# EAGLE board improved sample-and-hold-cpy (EAGLE 7.2.0)
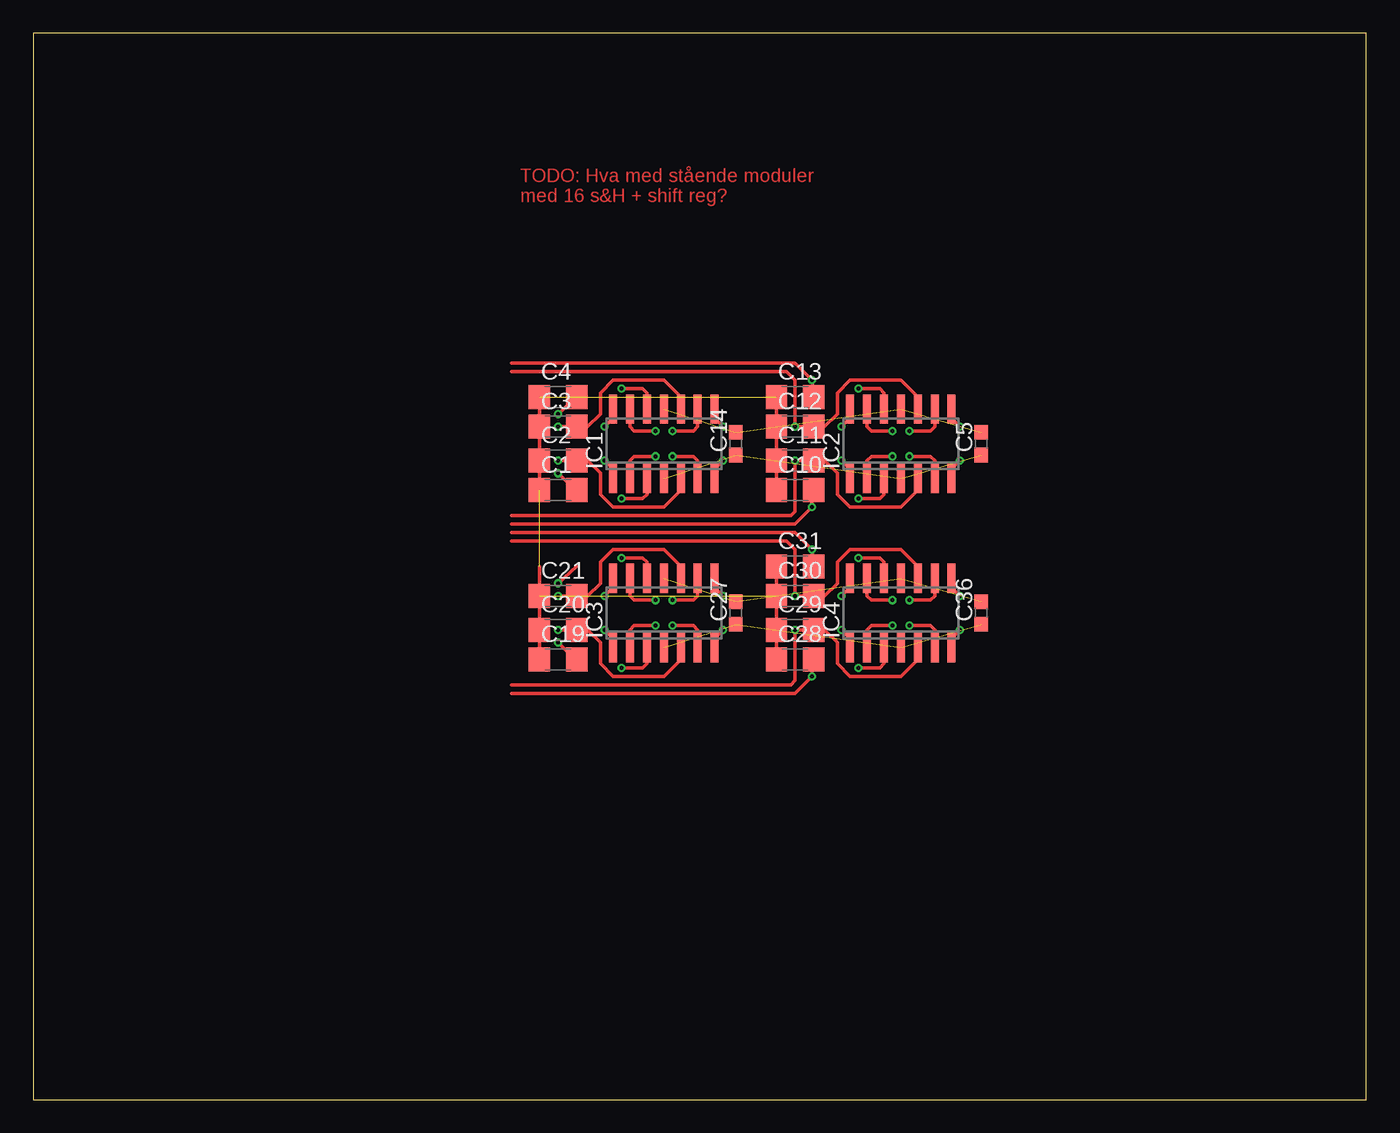
[diagram p0: board, top side]
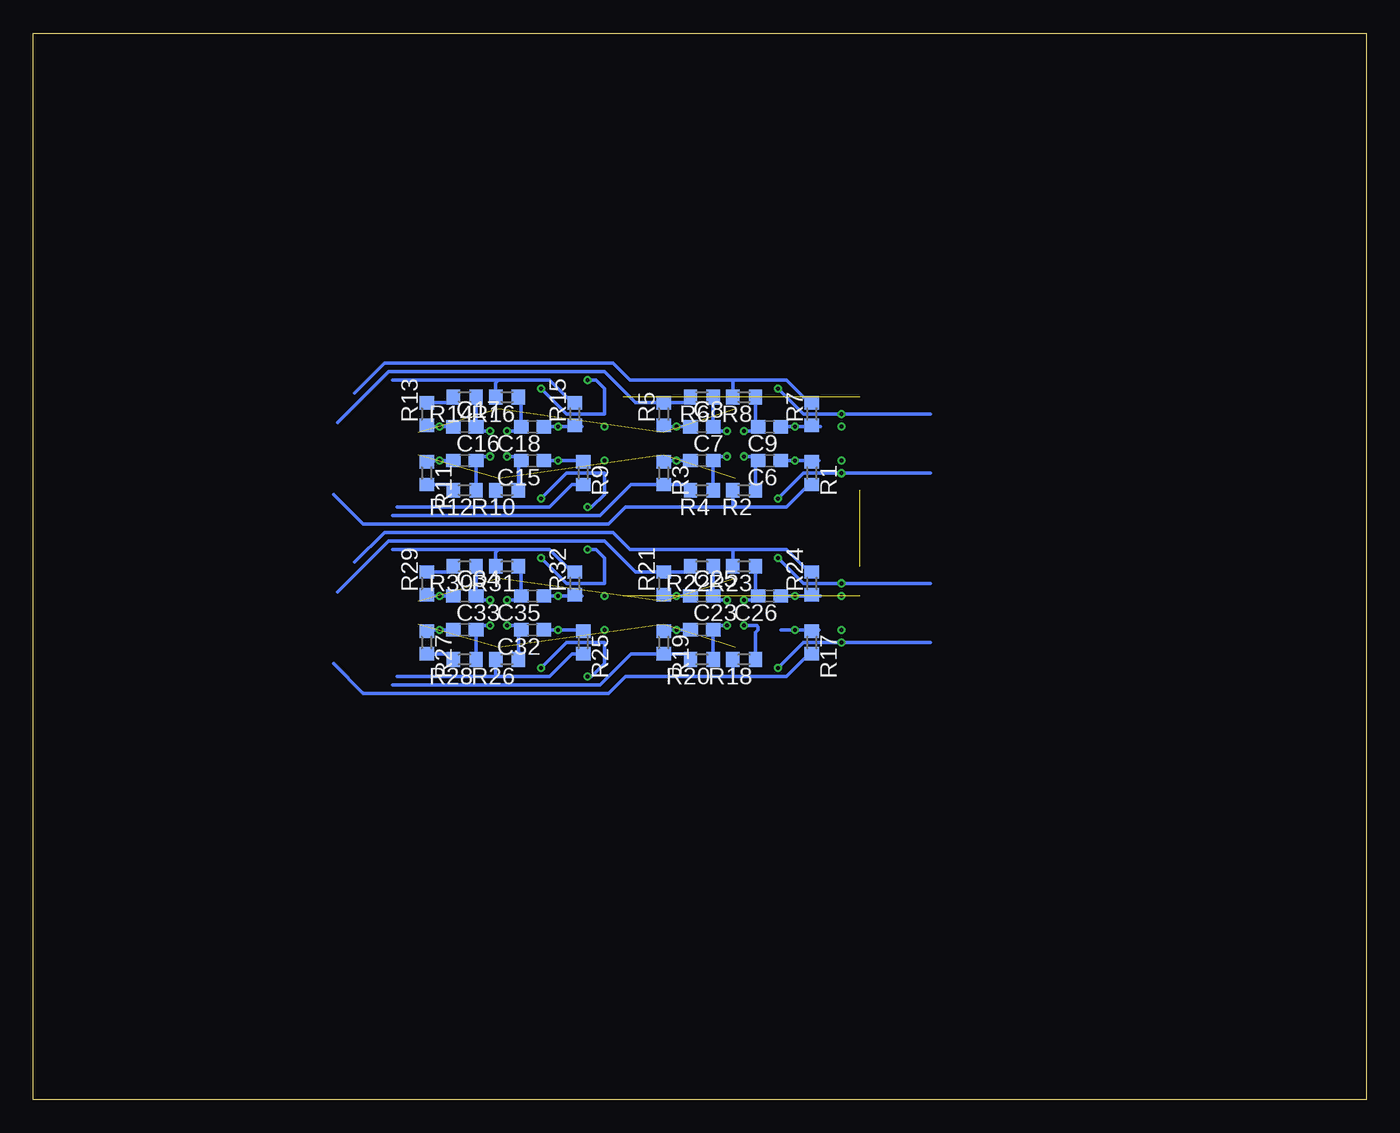
[diagram p1: board, bottom side, seen from below]

Size 100 x 80 mm. Coordinates in mm from the lower left corner, seen from the top.
Outline: 0,0 100,0 100,80 0,80 0,0
Copper layers (1*16): Top 0.035mm / dielectric 1.5mm / Bottom 0.035mm
Design rules "dirt_cheap_dirty_boards.v1": minimum track width 5mil, minimum drill 12mil, track to track 5mil, track to pad 5mil, pad to pad 5mil, via to via 5mil, smd to smd 0mil, copper to edge 10mil, drill to drill 10mil, minimum pad ring 10mil, minimum via ring 6mil, stop-mask expansion 2mil, vias tented up to drill 25mil, thermal gap 10mil

## Footprints (pad centres in the part's own frame; a part is rotated, then mirrored left to right if it is on the bottom)
C1206 = smd 1.6 x 1.8: 1 -1.4,0; 2 1.4,0
C0603 = smd 1.1 x 1: 1 -0.85,0; 2 0.85,0
SO14 = smd 0.6 x 2.2: 1 -3.81,-2.6; 2 -2.54,-2.6; 3 -1.27,-2.6; 4 0,-2.6; 5 1.27,-2.6; 6 2.54,-2.6; 7 3.81,-2.6; 8 3.81,2.6; 9 2.54,2.6; 10 1.27,2.6; 11 0,2.6; 12 -1.27,2.6; 13 -2.54,2.6; 14 -3.81,2.6
R0603 = smd 1 x 1.1: 1 -0.85,0; 2 0.85,0

## Placement (x,y rotation side)
C1  [C1206]  39.37,45.72 0 top
C2  [C1206]  39.37,47.94 0 top
C3  [C1206]  39.37,50.48 0 top
C4  [C1206]  39.37,52.7 0 top
C5  0.1uF  [C0603]  71.12,49.21 90 top
C6  0.1uF  [C0603]  44.77,47.94 180 bottom
C7  0.1uF  [C0603]  49.85,47.94 0 bottom
C8  0.1uF  [C0603]  49.85,50.48 0 bottom
C9  0.1uF  [C0603]  44.77,50.48 180 bottom
C10  [C1206]  57.15,45.72 0 top
C11  [C1206]  57.15,47.94 0 top
C12  [C1206]  57.15,50.48 0 top
C13  [C1206]  57.15,52.7 0 top
C14  0.1uF  [C0603]  52.7,49.21 90 top
C15  0.1uF  [C0603]  62.55,47.94 180 bottom
C16  0.1uF  [C0603]  67.63,47.94 0 bottom
C17  0.1uF  [C0603]  67.63,50.48 0 bottom
C18  0.1uF  [C0603]  62.55,50.48 180 bottom
C19  [C1206]  39.37,33.02 0 top
C20  [C1206]  39.37,35.24 0 top
C21  [C1206]  39.37,37.78 0 top
C23  0.1uF  [C0603]  49.85,35.24 0 bottom
C25  0.1uF  [C0603]  49.85,37.78 0 bottom
C26  0.1uF  [C0603]  44.77,37.78 180 bottom
C27  0.1uF  [C0603]  52.7,36.51 90 top
C28  [C1206]  57.15,33.02 0 top
C29  [C1206]  57.15,35.24 0 top
C30  [C1206]  57.15,37.78 0 top
C31  [C1206]  57.15,40.01 0 top
C32  0.1uF  [C0603]  62.55,35.24 180 bottom
C33  0.1uF  [C0603]  67.63,35.24 0 bottom
C34  0.1uF  [C0603]  67.63,37.78 0 bottom
C35  0.1uF  [C0603]  62.55,37.78 180 bottom
C36  0.1uF  [C0603]  71.12,36.51 90 top
IC1  TL074D  [SO14]  47.31,49.21 0 top
IC2  TL074D  [SO14]  65.09,49.21 0 top
IC3  TL074D  [SO14]  47.31,36.51 0 top
IC4  TL074D  [SO14]  65.09,36.51 0 top
R1  100R  [R0603]  41.59,46.99 270 bottom
R2  1k  [R0603]  46.67,45.72 180 bottom
R3  100R  [R0603]  52.7,46.99 270 bottom
R4  1k  [R0603]  49.85,45.72 180 bottom
R5  100R  [R0603]  52.7,51.44 90 bottom
R6  1k  [R0603]  49.85,52.7 180 bottom
R7  100R  [R0603]  41.59,51.44 90 bottom
R8  1k  [R0603]  46.67,52.7 180 bottom
R9  100R  [R0603]  58.74,46.99 270 bottom
R10  1k  [R0603]  64.45,45.72 180 bottom
R11  100R  [R0603]  70.48,46.99 270 bottom
R12  1k  [R0603]  67.63,45.72 180 bottom
R13  100R  [R0603]  70.48,51.44 90 bottom
R14  1k  [R0603]  67.63,52.7 180 bottom
R15  100R  [R0603]  59.37,51.44 90 bottom
R16  1k  [R0603]  64.45,52.7 180 bottom
R17  100R  [R0603]  41.59,34.29 270 bottom
R18  1k  [R0603]  46.67,33.02 180 bottom
R19  100R  [R0603]  52.7,34.29 270 bottom
R20  1k  [R0603]  49.85,33.02 180 bottom
R21  100R  [R0603]  52.7,38.73 90 bottom
R22  1k  [R0603]  49.85,40.01 180 bottom
R23  1k  [R0603]  46.67,40.01 180 bottom
R24  100R  [R0603]  41.59,38.73 90 bottom
R25  100R  [R0603]  58.74,34.29 270 bottom
R26  1k  [R0603]  64.45,33.02 180 bottom
R27  100R  [R0603]  70.48,34.29 270 bottom
R28  1k  [R0603]  67.63,33.02 180 bottom
R29  100R  [R0603]  70.48,38.73 90 bottom
R30  1k  [R0603]  67.63,40.01 180 bottom
R31  1k  [R0603]  64.45,40.01 180 bottom
R32  100R  [R0603]  59.37,38.73 90 bottom

## Library data of the parts
C1-C21 C23 C25-C36 R1-R32 = resistor
IC1-IC4 = linear

## Nets
+15V: C5.1 C14.1 IC1.4 IC2.4
+15V1: C27.1 C36.1 IC3.4 IC4.4
-15V: C5.2 C14.2 IC1.11 IC2.11
-15V1: C27.2 C36.2 IC3.11 IC4.11
AGND: C1.1 C2.1 C3.1 C4.1 C10.1 C11.1 C12.1 C13.1
AGND1: C19.1 C20.1 C21.1 C28.1 C29.1 C30.1 C31.1
IN0: C13.2 IC2.12
IN1: C4.2 IC1.12
IN2: C12.2 IC2.10
IN3: C3.2 IC1.10
IN4: C2.2 IC1.5
IN5: C11.2 IC2.5
IN6: C1.2 IC1.3
IN7: C10.2 IC2.3
IN8: IC3.12
IN9: C21.2 IC3.10
IN10: C20.2 IC3.5
IN11: C19.2 IC3.3
IN12: C28.2 IC4.3
IN13: C29.2 IC4.5
IN14: C30.2 IC4.10
IN15: C31.2 IC4.12
N$1: C6.2 IC1.2 R2.1
N$2: C6.1 IC1.1 R1.1
N$3: C7.1 IC1.7 R3.1
N$4: C8.1 IC1.8 R5.1
N$5: C7.2 IC1.6 R4.1
N$6: C9.1 IC1.14 R7.1
N$7: C8.2 IC1.9 R6.1
N$8: C9.2 IC1.13 R8.1
N$9: IC3.1 R17.1
N$10: IC3.2 R18.1
N$11: C15.1 IC2.1 R9.1
N$12: C15.2 IC2.2 R10.1
N$13: C16.1 IC2.7 R11.1
N$14: C16.2 IC2.6 R12.1
N$15: C17.1 IC2.8 R13.1
N$16: C18.1 IC2.14 R15.1
N$17: C17.2 IC2.9 R14.1
N$18: C18.2 IC2.13 R16.1
N$19: C23.1 IC3.7 R19.1
N$20: C23.2 IC3.6 R20.1
N$21: C25.1 IC3.8 R21.1
N$22: C26.1 IC3.14 R24.1
N$23: C25.2 IC3.9 R22.1
N$24: C26.2 IC3.13 R23.1
N$25: C32.1 IC4.1 R25.1
N$26: C32.2 IC4.2 R26.1
N$27: C33.1 IC4.7 R27.1
N$28: C33.2 IC4.6 R28.1
N$29: C34.1 IC4.8 R29.1
N$30: C35.1 IC4.14 R32.1
N$31: C34.2 IC4.9 R30.1
N$32: C35.2 IC4.13 R31.1
OUT0: R15.2 R16.2
OUT1: R7.2 R8.2
OUT2: R13.2 R14.2
OUT3: R5.2 R6.2
OUT4: R3.2 R4.2
OUT5: R11.2 R12.2
OUT6: R1.2 R2.2
OUT7: R9.2 R10.2
OUT8: R23.2 R24.2
OUT9: R21.2 R22.2
OUT10: R19.2 R20.2
OUT11: R17.2 R18.2
OUT12: R31.2 R32.2
OUT13: R29.2 R30.2
OUT14: R27.2 R28.2
OUT15: R25.2 R26.2

## Tracks (layer width: path | path; a pad name or v marks a point on that pad's centre or on a via)
+15V  (3 unrouted)
+15V1  (3 unrouted)
-15V  (3 unrouted)
-15V1  (3 unrouted)
AGND  (2 unrouted)
  Top 0.254: C4.1 C3.1 C2.1 C1.1 | C12.1 55.88,50.48 | C10.1 C11.1 C12.1 | C12.1 C13.1
AGND1  (1 unrouted)
  Top 0.254: 37.97,40.01 C21.1 C20.1 C19.1 | C30.1 55.88,37.78 | C28.1 C29.1 C30.1 | C30.1 C31.1
IN0  (via drill 0.3)
  Top 0.254: IC2.12 63.82,53.02 63.5,53.34 v61.91,53.34 | C13.2 v58.42,53.98 57.15,55.24 35.88,55.24
  Bottom 0.254: v61.91,53.34 60.01,51.44 57.15,51.44 57.15,53.34 57.78,53.98 v58.42,53.98
IN1  (via drill 0.3)
  Top 0.254: C4.2 v39.37,51.44 | IC1.12 46.04,53.02 45.72,53.34 v44.13,53.34
  Bottom 0.254: 32.7,51.44 v39.37,51.44 42.23,51.44 v44.13,53.34
IN2  (via drill 0.3)
  Top 0.254: IC2.10 66.36,52.7 65.09,53.98 61.28,53.98 60.33,53.02 60.33,51.44 59.37,50.48 C12.2 58.55,50.61 58.42,50.48 v57.15,50.48 57.15,53.98 56.52,54.61 35.88,54.61
IN3  (via drill 0.3)
  Top 0.254: v39.37,50.48 C3.2 41.59,50.48 42.55,51.44 42.55,53.02 43.5,53.98 47.31,53.98 48.58,52.7 IC1.10
IN4  (via drill 0.3)
  Top 0.254: v39.37,47.94 C2.2 40.77,47.81 40.64,47.94 41.59,47.94 42.55,46.99 42.55,45.4 43.5,44.45 47.31,44.45 48.58,45.72 IC1.5
IN5  (via drill 0.3)
  Top 0.254: IC2.5 66.36,45.72 65.09,44.45 61.28,44.45 60.33,45.4 60.33,46.99 59.37,47.94 C11.2 58.55,47.81 58.42,47.94 v57.15,47.94 57.15,44.13 56.83,43.81 35.88,43.81
IN6  (via drill 0.3)
  Top 0.254: C1.2 40.64,45.72 v39.37,46.99 | v44.13,45.09 45.72,45.09 46.04,45.4 IC1.3
  Bottom 0.254: v44.13,45.09 42.23,46.99 v39.37,46.99 32.7,46.99
IN7  (via drill 0.3)
  Top 0.254: IC2.3 63.82,45.4 63.5,45.09 v61.91,45.09 | C10.2 58.42,45.4 v58.42,44.45 57.15,43.18 35.88,43.18
  Bottom 0.254: v61.91,45.09 60.01,46.99 57.15,46.99 57.15,45.4 58.1,44.45 v58.42,44.45
IN8  (via drill 0.3)
  Top 0.254: 40.77,40.01 v39.37,38.73 | IC3.12 46.04,40.32 45.72,40.64 v44.13,40.64
  Bottom 0.254: 32.7,38.73 v39.37,38.73 42.23,38.73 v44.13,40.64
IN9  (via drill 0.3)
  Top 0.254: v39.37,37.78 C21.2 41.59,37.78 42.55,38.73 42.55,40.32 43.5,41.27 47.31,41.27 48.58,40.01 IC3.10
IN10  (via drill 0.3)
  Top 0.254: v39.37,35.24 C20.2 40.77,35.11 40.64,35.24 41.59,35.24 42.55,34.29 42.55,32.7 43.5,31.75 47.31,31.75 48.58,33.02 IC3.5
IN11  (via drill 0.3)
  Top 0.254: C19.2 40.64,33.02 v39.37,34.29 | v44.13,32.38 45.72,32.38 46.04,32.7 IC3.3
  Bottom 0.254: v44.13,32.38 42.23,34.29 v39.37,34.29 32.7,34.29
IN12  (via drill 0.3)
  Top 0.254: IC4.3 63.82,32.7 63.5,32.38 v61.91,32.38 | C28.2 58.42,32.7 v58.42,31.75 57.15,30.48 35.88,30.48
  Bottom 0.254: v61.91,32.38 60.01,34.29 57.15,34.29 57.15,32.7 58.1,31.75 v58.42,31.75
IN13  (via drill 0.3)
  Top 0.254: IC4.5 66.36,33.02 65.09,31.75 61.28,31.75 60.33,32.7 60.33,34.29 59.37,35.24 C29.2 58.55,35.11 58.42,35.24 v57.15,35.24 57.15,31.43 56.83,31.11 35.88,31.11
IN14  (via drill 0.3)
  Top 0.254: IC4.10 66.36,40.01 65.09,41.27 61.28,41.27 60.33,40.32 60.33,38.73 59.37,37.78 C30.2 58.55,37.91 58.42,37.78 v57.15,37.78 57.15,41.27 56.52,41.91 35.88,41.91
IN15  (via drill 0.3)
  Top 0.254: IC4.12 63.82,40.32 63.5,40.64 v61.91,40.64 | C31.2 v58.42,41.27 57.15,42.55 35.88,42.55
  Bottom 0.254: v61.91,40.64 60.01,38.73 57.15,38.73 57.15,40.64 57.78,41.27 v58.42,41.27
N$1  (via drill 0.3)
  Top 0.254: IC1.2 44.77,47.94 45.09,48.26 v46.67,48.26
  Bottom 0.254: v46.67,48.26 45.72,48.26 45.62,48.16 C6.2 45.82,47.74 R2.1
N$2  (via drill 0.3)
  Top 0.254: IC1.1 43.5,47.31 v42.86,47.94
  Bottom 0.254: C6.1 v42.86,47.94 41.06,47.94 R1.1
N$3  (via drill 0.3)
  Top 0.254: IC1.7 51.12,47.31 v51.75,47.94
  Bottom 0.254: R3.1 52.6,47.94 v51.75,47.94 C7.1
N$4  (via drill 0.3)
  Top 0.254: IC1.8 51.12,51.12 v51.75,50.48
  Bottom 0.254: 53.12,50.59 R5.1 52.92,50.48 v51.75,50.48 C8.1
N$5  (via drill 0.3)
  Top 0.254: IC1.6 49.85,47.94 49.53,48.26 v47.94,48.26
  Bottom 0.254: R4.1 C7.2 48.68,48.26 v47.94,48.26
N$6  (via drill 0.3)
  Top 0.254: v42.86,50.48 43.5,51.12 IC1.14
  Bottom 0.254: C9.1 v42.86,50.48 40.96,50.48 R7.1
N$7  (via drill 0.3)
  Top 0.254: IC1.9 49.85,50.48 49.53,50.16 v47.94,50.16
  Bottom 0.254: R6.1 C8.2 49.31,50.16 v47.94,50.16
N$8  (via drill 0.3)
  Top 0.254: v46.67,50.16 45.09,50.16 44.77,50.48 IC1.13
  Bottom 0.254: C9.2 45.72,50.16 | 45.72,50.16 v46.67,50.16 | R8.1 45.82,50.27 45.72,50.16
N$9  (via drill 0.3)
  Top 0.254: IC3.1 43.5,34.61 v42.86,35.24
  Bottom 0.254: 43.92,35.24 v42.86,35.24 41.06,35.24 R17.1
N$10  (via drill 0.3)
  Top 0.254: IC3.2 44.77,35.24 45.09,35.56 v46.67,35.56
  Bottom 0.254: v46.67,35.56 45.72,35.56 45.62,35.46 45.62,35.24 45.82,35.04 R18.1
N$11  (via drill 0.3)
  Top 0.254: IC2.1 61.28,47.31 v60.64,47.94
  Bottom 0.254: R9.1 58.84,47.94 v60.64,47.94 C15.1
N$12  (via drill 0.3)
  Top 0.254: IC2.2 62.55,47.94 62.87,48.26 v64.45,48.26
  Bottom 0.254: v64.45,48.26 63.72,48.26 C15.2 63.6,47.74 R10.1
N$13  (via drill 0.3)
  Top 0.254: IC2.7 68.9,47.31 v69.53,47.94
  Bottom 0.254: R11.1 70.38,47.94 v69.53,47.94 C16.1
N$14  (via drill 0.3)
  Top 0.254: IC2.6 67.63,47.94 67.31,48.26 v65.72,48.26
  Bottom 0.254: v65.72,48.26 66.46,48.26 C16.2 R12.1
N$15  (via drill 0.3)
  Top 0.254: IC2.8 68.9,51.12 v69.53,50.48
  Bottom 0.254: R13.1 70.38,50.48 v69.53,50.48 C17.1
N$16  (via drill 0.3)
  Top 0.254: IC2.14 61.28,51.12 v60.64,50.48
  Bottom 0.254: R15.1 58.84,50.48 v60.64,50.48 C18.1
N$17  (via drill 0.3)
  Top 0.254: IC2.9 67.63,50.48 67.31,50.16 v65.72,50.16
  Bottom 0.254: v65.72,50.16 66.46,50.16 C17.2 R14.1
N$18  (via drill 0.3)
  Top 0.254: IC2.13 62.55,50.48 62.87,50.16 v64.45,50.16
  Bottom 0.254: R16.1 63.4,52.5 C18.2 63.72,50.16 v64.45,50.16
N$19  (via drill 0.3)
  Top 0.254: IC3.7 51.12,34.61 v51.75,35.24
  Bottom 0.254: R19.1 52.6,35.24 v51.75,35.24 C23.1
N$20  (via drill 0.3)
  Top 0.254: IC3.6 49.85,35.24 49.53,35.56 v47.94,35.56
  Bottom 0.254: R20.1 C23.2 48.68,35.56 v47.94,35.56
N$21  (via drill 0.3)
  Top 0.254: IC3.8 51.12,38.42 v51.75,37.78
  Bottom 0.254: 53.12,37.88 R21.1 52.92,37.78 v51.75,37.78 C25.1
N$22  (via drill 0.3)
  Top 0.254: v42.86,37.78 43.5,38.42 IC3.14
  Bottom 0.254: C26.1 v42.86,37.78 40.96,37.78 R24.1
N$23  (via drill 0.3)
  Top 0.254: IC3.9 49.85,37.78 49.53,37.47 v47.94,37.47
  Bottom 0.254: R22.1 C25.2 49.31,37.47 v47.94,37.47
N$24  (via drill 0.3)
  Top 0.254: v46.67,37.47 45.09,37.47 44.77,37.78 IC3.13
  Bottom 0.254: C26.2 45.72,37.47 | 45.72,37.47 v46.67,37.47 | R23.1 45.82,37.57 45.72,37.47
N$25  (via drill 0.3)
  Top 0.254: IC4.1 61.28,34.61 v60.64,35.24
  Bottom 0.254: R25.1 58.84,35.24 v60.64,35.24 C32.1
N$26  (via drill 0.3)
  Top 0.254: IC4.2 62.55,35.24 62.87,35.56 v64.45,35.56
  Bottom 0.254: v64.45,35.56 63.72,35.56 C32.2 63.6,35.04 R26.1
N$27  (via drill 0.3)
  Top 0.254: IC4.7 68.9,34.61 v69.53,35.24
  Bottom 0.254: R27.1 70.38,35.24 v69.53,35.24 C33.1
N$28  (via drill 0.3)
  Top 0.254: IC4.6 67.63,35.24 67.31,35.56 v65.72,35.56
  Bottom 0.254: v65.72,35.56 66.46,35.56 C33.2 R28.1
N$29  (via drill 0.3)
  Top 0.254: IC4.8 68.9,38.42 v69.53,37.78
  Bottom 0.254: R29.1 70.38,37.78 v69.53,37.78 C34.1
N$30  (via drill 0.3)
  Top 0.254: IC4.14 61.28,38.42 v60.64,37.78
  Bottom 0.254: R32.1 58.84,37.78 v60.64,37.78 C35.1
N$31  (via drill 0.3)
  Top 0.254: IC4.9 67.63,37.78 67.31,37.47 v65.72,37.47
  Bottom 0.254: v65.72,37.47 66.46,37.47 C34.2 R30.1
N$32  (via drill 0.3)
  Top 0.254: IC4.13 62.55,37.78 62.87,37.47 v64.45,37.47
  Bottom 0.254: R31.1 63.4,39.8 C35.2 63.72,37.47 v64.45,37.47
OUT0
  Bottom 0.254: R15.2 59.59,52.28 61.28,53.98 65.09,53.98 | 65.09,53.98 73.03,53.98 | R16.2 65.3,53.76 65.09,53.98
OUT1
  Bottom 0.254: R7.2 41.81,52.28 43.5,53.98 47.62,53.98 | 47.62,53.98 55.24,53.98 56.52,55.24 73.66,55.24 75.88,53.02 | R8.2 47.52,53.87 47.62,53.98
OUT2
  Bottom 0.254: R13.2 68.9,52.28 R14.2
OUT3
  Bottom 0.254: R6.2 51.12,52.28 R5.2 54.83,52.28 57.15,54.61 73.34,54.61 77.15,50.8
OUT4
  Bottom 0.254: 73.03,43.81 57.47,43.81 55.14,46.14 R3.2 51.12,46.14 R4.2
OUT5
  Bottom 0.254: R11.2 68.9,46.14 R12.2
OUT6
  Bottom 0.254: R1.2 41.81,46.14 43.5,44.45 47.62,44.45 | 47.62,44.45 55.56,44.45 56.83,43.18 75.25,43.18 77.47,45.4 | R2.2 47.52,44.55 47.62,44.45
OUT7
  Bottom 0.254: R9.2 59.59,46.14 61.28,44.45 65.41,44.45 | 65.41,44.45 72.71,44.45 | R10.2 65.3,44.55 65.41,44.45
OUT8
  Bottom 0.254: R24.2 41.81,39.59 43.5,41.27 47.62,41.27 | 47.62,41.27 55.24,41.27 56.52,42.55 73.66,42.55 75.88,40.32 | R23.2 47.52,41.17 47.62,41.27
OUT9
  Bottom 0.254: R22.2 51.12,39.59 R21.2 54.83,39.59 57.15,41.91 73.34,41.91 77.15,38.1
OUT10
  Bottom 0.254: 73.03,31.11 57.47,31.11 55.14,33.44 R19.2 51.12,33.44 R20.2
OUT11
  Bottom 0.254: R17.2 41.81,33.44 43.5,31.75 47.62,31.75 | 47.62,31.75 55.56,31.75 56.83,30.48 75.25,30.48 77.47,32.7 | R18.2 47.52,31.85 47.62,31.75
OUT12
  Bottom 0.254: R32.2 59.59,39.59 61.28,41.27 65.09,41.27 | 65.09,41.27 73.03,41.27 | R31.2 65.3,41.06 65.09,41.27
OUT13
  Bottom 0.254: R29.2 68.9,39.59 R30.2
OUT14
  Bottom 0.254: R27.2 68.9,33.44 R28.2
OUT15
  Bottom 0.254: R25.2 59.59,33.44 61.28,31.75 65.41,31.75 | 65.41,31.75 72.71,31.75 | R26.2 65.3,31.85 65.41,31.75

## Text on the board
Top: TODO: Hva med stående moduler / med 16 s&H + shift reg?